# EAGLE board BOBBYPIN (EAGLE 6.6.0)
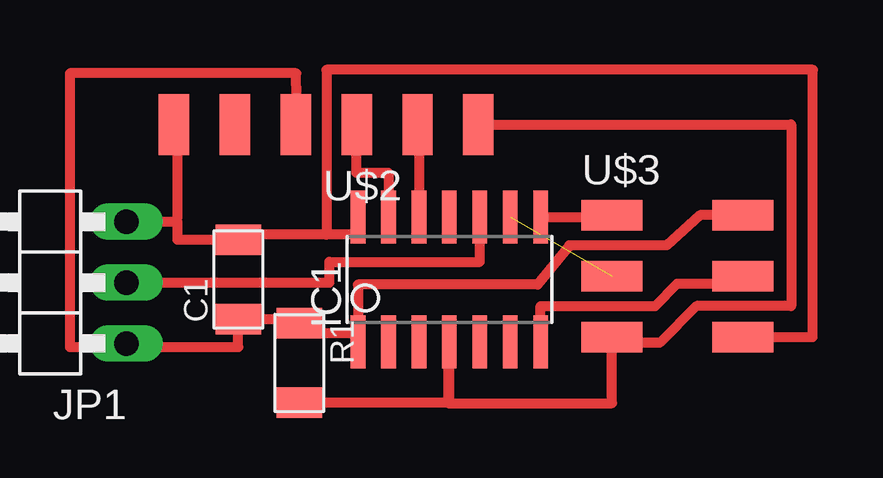
[diagram p0: board, top side]

No outline drawn. Coordinates in mm, seen from the top.
Copper layers (1*16): Top 0.035mm / dielectric 1.5mm / Bottom 0.035mm
Design rules "default *": minimum track width 16mil, minimum drill 24mil, track to track 16mil, track to pad 16mil, pad to pad 16mil, via to via 16mil, smd to smd 16mil, copper to edge 40mil, drill to drill 8mil, minimum pad ring 10mil, minimum via ring 8mil, stop-mask expansion 4mil, vias tented up to drill 0mil, thermal gap 10mil

## Footprints (pad centres in the part's own frame; a part is rotated, then mirrored left to right if it is on the bottom)
C1206FAB = smd 1.27 x 1.905: 1 -1.651,0; 2 1.651,0
SOIC14 = smd 0.61 x 2.21: 1 -3.81,-2.603; 2 -2.54,-2.603; 3 -1.27,-2.603; 4 0,-2.603; 5 1.27,-2.603; 6 2.54,-2.603; 7 3.81,-2.603; 8 3.81,2.603; 9 2.54,2.603; 10 1.27,2.603; 11 0,2.603; 12 -1.27,2.603; 13 -2.54,2.603; 14 -3.81,2.603
1X03/90 = drill 1.016 long: 1 -2.54,-3.81; 2 0,-3.81; 3 2.54,-3.81
R1206FAB = smd 1.27 x 1.905: 1 -1.651,0; 2 1.651,0
1X06SMD = smd 2.54 x 1.27: 1 0,6.35; 2 0,3.81; 3 0,1.27; 4 0,-1.27; 5 0,-3.81; 6 0,-6.35
2X03SMD = smd 2.54 x 1.27: 1 -2.54,2.54; 2 2.92,2.54; 3 -2.54,0; 4 2.92,0; 5 -2.54,-2.54; 6 2.92,-2.54

## Placement (x,y rotation side)
C1  [C1206FAB]  7.71,21.59 90 top
IC1  ATTINY44-SSU  [SOIC14]  16.51,21.59 0 top
JP1  [1X03/90]  -0.76,21.46 90 top
R1  [R1206FAB]  10.25,18.11 270 top
U$2  FTDI-SMD-HEADER  [1X06SMD]  11.37,28.05 90 top
U$3  AVRISPSMD  [2X03SMD]  25.83,21.73 0 top

## Library data of the parts
C1 IC1 R1 U$2 U$3 = fab
JP1 = pinhead

## Nets
N$1: IC1.8 U$3.1
N$2: IC1.7 U$3.4
N$3: IC1.4 R1.2 U$2.6 U$3.5
N$4: IC1.9 U$3.3
N$5: C1.2 IC1.14 JP1.3 U$2.1 U$3.6
N$6: C1.1 IC1.1 JP1.1 R1.1 U$2.3 U$3.2
N$7: IC1.13 U$2.4
N$8: IC1.12 U$2.5
N$9: IC1.10 JP1.2

## Tracks (layer width: path | path; a pad name or v marks a point on that pad's centre or on a via)
N$1
  Top 0.406: IC1.8 23.29,24.19 U$3.1
N$2
  Top 0.406: IC1.7 20.31,20.48 25.09,20.48 26.01,21.42 28.44,21.42 U$3.4
N$3
  Top 0.406: R1.2 16.51,16.46 IC1.4 16.46,18.99 16.46,16.43 23.29,16.43 U$3.5 23.53,18.95 25.28,18.95 26.81,20.48 30.76,20.48 30.76,28.05 U$2.6
N$4  (1 unrouted)
N$5
  Top 0.406: U$2.1 5.16,28.05 5.16,24.17 5.16,24 | 5.16,24 5.16,23.24 C1.2 7.71,23.46 11.38,23.46 | IC1.14 12.77,24.19 12.77,23.46 11.38,23.46 | 28.75,19.01 U$3.6 31.65,19.19 31.66,30.33 11.38,30.34 11.38,23.46 | JP1.3 5.16,24
N$6
  Top 0.406: 12.7,18.7 IC1.1 12.7,19.33 | R1.1 10.34,19.94 | R1.1 10.25,19.94 C1.1 7.71,18.77 3.06,18.77 | U$2.3 10.16,28.05 10.12,30.19 0.68,30.19 0.68,18.77 3.06,18.77 | U$3.2 26.96,24.27 25.56,23.01 21.51,23.01 20.18,21.38 12.7,21.38 12.7,19.33 | 12.7,19.33 10.25,19.33 R1.1 | JP1.1 3.06,18.77
N$7
  Top 0.406: U$2.4 12.62,28.05 12.62,26.04 13.97,26.04 IC1.13
N$8
  Top 0.406: U$2.5 15.24,28.05 IC1.12
N$9
  Top 0.406: JP1.2 11.51,21.46 11.51,22.32 17.78,22.32 IC1.10